# Altium PCB SumoPCB.PcbDoc (part 2 of 2)
Units mil, origin at the board's own origin, x right, y up, seen from the top; angles counter-clockwise.
Board outline 5511.81 x 5511.81 mil, 2 copper layers (Top Layer, Bottom Layer); 161 components, 158 nets, 711 pads, 189 vias.
Unrouted connection lines stored in the file: 147.
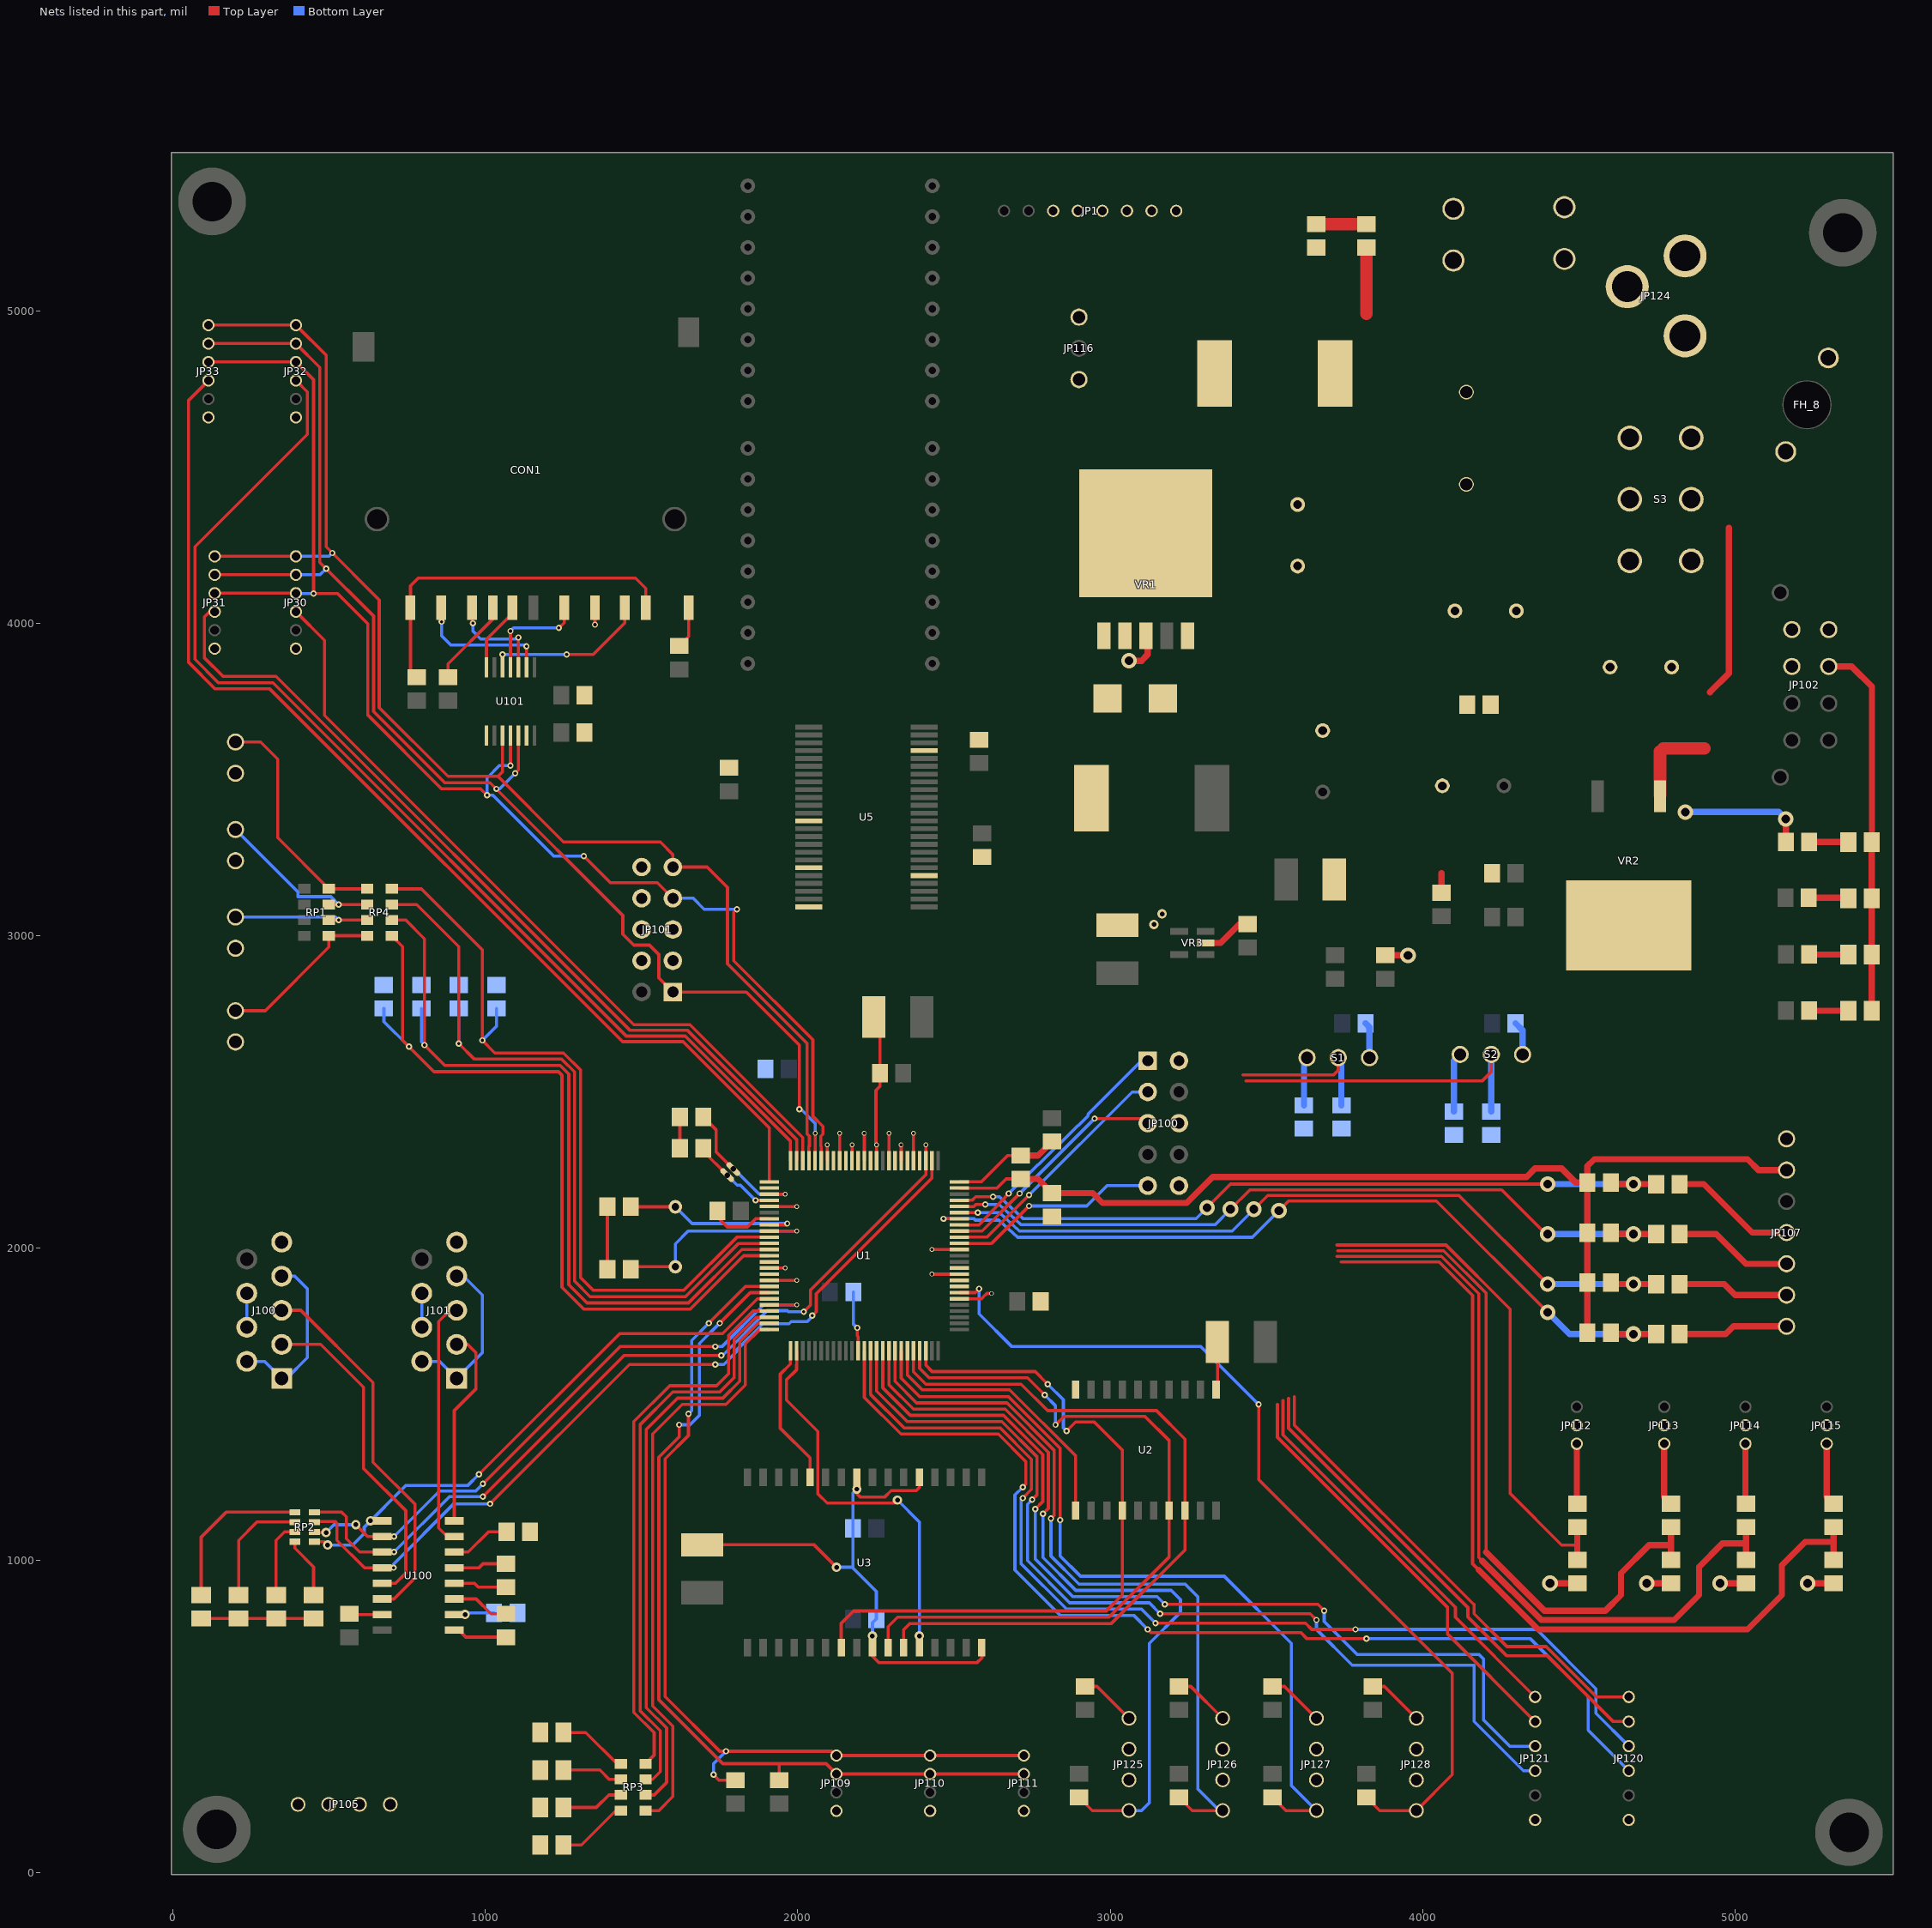
[diagram p2: the nets of this part, all layers, seen from the top]

## Via types
v1: diameter 20, hole 10, Top Layer to Bottom Layer, 98 vias
v2: diameter 30, hole 15, Top Layer to Bottom Layer, 37 vias
v3: diameter 50, hole 28, Top Layer to Bottom Layer, 32 vias
v4: diameter 15, hole 10, Top Layer to Bottom Layer, 21 vias
v5: diameter 35, hole 20, Top Layer to Bottom Layer, 1 vias

## Nets (pads, with @x,y where several pads share a name; then routed paths per layer and width w, separated by ;. In a path a pad name is that pad's centre, name@x,y a point inside that pad or via, vN(x,y) a via of type N, cw(c..) or ccw(c..) an arc to the next point about the centre after c; other vN are vias at no path point) (continued)
AD5: U1.73 U2.14 U3.23 | length 2344
  Top Layer w10: U3.23@2138.92,721.28 2138.92,798.92 2178.92,838.92 2987.35,838.92 3038.92,890.49 3038.92,1353.92 2948.84,1444 2889,1444 v1(2860,1415) ; U1.73@2409.55,1671.91 2409.55,1625.45 2430,1605 2760,1605 v1(2800,1565)
  Bottom Layer w10: v1(2800,1565) 2850,1515 2850,1425 v1(2860,1415)
AD6: U1.72 U2.17 U3.26 | length 2441
  Top Layer w10: U3.26@2288.92,721.28 2288.92,788.92 2318.92,818.92 2995.64,818.92 3188.92,1012.2 3188.92,1383.92 3110.84,1462 2852,1462 v1(2825,1435) ; U1.72@2389.87,1671.91 2389.87,1615.13 2420,1585 2735,1585 v1(2790,1530)
  Bottom Layer w10: v1(2790,1530) 2825,1495 v1(2825,1435)
AD7: U1.71 U2.18 U3.27 | length 2443.5
  Top Layer w10: U3.27@2338.92,721.28 2338.92,778.92 2358.92,798.92 3003.92,798.92 3238.92,1033.92 3238.92,1388.92 3147.84,1480 2800,1480 2715,1565 2410,1565 2370.18,1604.82 U1.71@2370.18,1671.91
ADC0: R120.1 R121.2 U1.97 | length 2383.5
  Top Layer w10: U1.97@2516.83,2153.21 2557.76,2153.21 2569.54,2165 v1(2625,2165) ; v3(3310,2130) 3385,2205 v3(4400,2205)
  Top Layer w20: R121.2@4602.4,2210 4607.4,2205 R120.1@4747.6,2205
  Bottom Layer w10: v1(2625,2165) 2645,2165 2720,2095 3275,2095 v3(3310,2130)
  Bottom Layer w20: v3(4400,2205) v3(4675,2205)
ADC1: R122.1 R123.2 U1.96 | length 2438.9
  Top Layer w10: U1.96@2516.83,2133.53 2563.53,2133.53 2570,2140 v1(2600,2140) ; v3(3385,2125) 3447,2187 4253,2187 4395,2045 v3(4400,2045)
  Top Layer w20: R123.2@4602.4,2050 4607.4,2045 R122.1@4747.6,2045
  Bottom Layer w10: v1(2600,2140) 2644.54,2140 2714.54,2075 3335,2075 v3(3385,2125)
  Bottom Layer w20: v3(4400,2045) v3(4675,2045)
ADC2: R124.1 R125.2 U1.95 | length 2493.3
  Top Layer w10: U1.95@2516.83,2113.84 v1(2576.16,2113.84) ; v3(3460,2125) 3504,2169 4116,2169 v3(4400,1885)
  Top Layer w20: R125.2@4602.4,1890 4607.4,1885 R124.1@4747.6,1885
  Bottom Layer w10: v1(2576.16,2113.84) 2645.25,2113.84 2709.09,2055 3390,2055 v3(3460,2125)
  Bottom Layer w20: v3(4400,1885) v3(4675,1885)
ADC3: R126.1 R127.2 U1.94 | length 2660.9
  Top Layer w10: v1(2465.84,2094.16) U1.94@2516.83,2094.16 ; v3(3540,2120) 3571,2151 4044,2151 v3(4400,1795)
  Top Layer w20: R127.2@4602.4,1730 4607.4,1725 R126.1@4747.6,1725
  Bottom Layer w10: v1@2470,2090 v1(2465.84,2094.16) 2564.26,2094.16 2568.42,2090 2643.63,2090 2703.63,2035 3455,2035 v3(3540,2120)
  Bottom Layer w20: v3(4400,1795) 4470,1725 v3(4675,1725)
AGND: C8.2 JP107.2 R2.2 R121.1 R123.1 R125.1 R127.1 U1.99 | length 3312.4
  Top Layer w10: U1.99@2516.83,2192.58 2637.58,2192.58 2666.52,2221.52 C8.2@2713.92,2221.52
  Top Layer w20: C8.2@2713.92,2221.52 2768.72,2221.52 R2.2@2813.92,2176.32 2943.68,2176.32 2975,2145 3245,2145 3328,2228 4333,2228 4360,2255 4445,2255 4490,2210 R121.1@4527.6,2210 ; R127.1@4527.6,1730 4527.6,2262.6 4550,2285 5040,2285 5075,2250 JP107.2@5165,2250
ALE: U1.70 U2.11 | length 898.9
  Top Layer w10: U1.70@2350.5,1671.91 2350.5,1594.5 2398,1547 2678,1547 2888.92,1336.08 U2.11@2888.92,1160.02
AVCC: C8.1 R1.1 U1.100 | length 350.6
  Top Layer w10: U1.100@2516.83,2212.27 2587.27,2212.27 2671.32,2296.32 C8.1@2713.92,2296.32
  Top Layer w20: C8.1@2713.92,2296.32 2768.72,2296.32 R1.1@2813.92,2341.52
BMP1: C130.2 RP4.8 U1.35 | length 2492
  Top Layer w10: RP4.8@700,3150 795,3150 990,2955 v1(990,2665) 1030,2625 1250,2625 1305,2570 1305,1905 1345,1865 1635,1865 1805.1,2035.1 U1.35@1908.57,2035.1
  Bottom Layer w10: v1(990,2665) 1035,2710 C130.2@1035,2767.6
BMP2: C131.2 RP4.7 U1.36 | length 2485.4
  Top Layer w10: RP4.7@700,3100 780,3100 915,2965 v1(915,2655) 965,2605 1244.54,2605 1285,2564.54 1285,1895 1335,1845 1640.46,1845 1810.87,2015.42 U1.36@1908.57,2015.42
  Bottom Layer w10: v1(915,2655) C131.2@915,2767.6
BMP3: C132.2 RP4.6 U1.37 | length 2502.5
  Top Layer w10: RP4.6@700,3050 745,3050 805,2990 v1(805,2650) 870,2585 1239.09,2585 1267,2557.09 1267,1883 1325,1825 1650,1825 1820.73,1995.73 U1.37@1908.57,1995.73
  Bottom Layer w10: C132.2@795,2767.6 795,2660 v1(805,2650)
BMP4: C133.2 RP4.5 U1.38 | length 2503.4
  Top Layer w10: RP4.5@700,3000 735,2965 735,2665 835,2565 1233.63,2565 1245,2553.63 1245,1875 1315,1805 1655.46,1805 1826.5,1976.05 U1.38@1908.57,1976.05
  Bottom Layer w10: C133.2@675,2767.6 675,2725 v1(755,2645)
DIAG1: RP3.8 U1.47 | length 1785.2
  Top Layer w10: RP3.8@1512.6,350 1540,377.4 1540,449.54 1475,514.54 1475,1445 1590,1560 1740,1560 1778,1598 1778,1720.54 1856.34,1798.88 U1.47@1908.57,1798.88
DIAG2: RP3.7 U1.48 | length 1822.9
  Top Layer w10: RP3.7@1512.6,300 1535,300 1560,325 1560,455 1495,520 1495,1435 1600,1540 1750,1540 1796,1586 1796,1708.46 1866.2,1778.65 1866.2,1779.2 U1.48@1908.57,1779.2
DIAG3: RP3.6 U1.49 | length 1849.5
  Top Layer w10: RP3.6@1512.6,250 1540,250 1580,290 1580,464.54 1515,529.54 1515,1420 1615,1520 1760,1520 1814,1574 1814,1701 1872.51,1759.51 U1.49@1908.57,1759.51
DIAG4: RP3.5 U1.50 | length 1882.3
  Top Layer w10: RP3.5@1512.6,200 1555,200 1600,245 1600,470 1535,535 1535,1405 1630,1500 1770,1500 1832,1562 1832,1693.54 1878.28,1739.83 U1.50@1908.57,1739.83
GND: C1.2 C2.2 C3.2 C4.1 C5.1 C6.1 C7.1 C10.1 C11.1 C12.1 C13.1 C14.1 C15.1 C39.2 C40.2 C41.2 C42.2 C43.2 C44.2 C45.2 C46.2 C47.2 C48.1 C49.1 C60.1 C61.2 C103.2 C104.2 C105.2 C110.1 C111.1 C113.2 C114.2 C115.1 C130.1 C131.1 C132.1 C133.1 CON1.3 CON1.6 D1.1 DS1.2 DS2.2 DS3.2 DS4.2 DS5.2 DS6.2 DS7.2 DS8.2 DS10.2 DS11.2 DS12.2 DS13.2 J100.5 J101.5 JP1.3 JP1.6 JP30.1 JP31.1 JP32.1 JP33.1 JP100.2 JP100.10 JP101.3 JP101.4 JP101.6 JP101.8 JP101.10 JP102.1 JP102.2 JP102.5 JP102.6 JP107.1 JP109.1 JP110.1 JP111.1 JP112.2 JP113.2 JP114.2 JP115.2 JP116.1 JP120.1 JP121.1 JP122.2 JP123.2 JP124.2 JP124.3 JP125.2 JP125.3 JP126.2 JP126.3 JP127.2 JP127.3 JP128.2 JP128.3 JP130.1 JP131.1 JP132.1 JP133.1 R2.1 R67.2 R68.2 R71.1 R73.1 R75.1 R77.1 R202.2 R204.2 R206.2 S3.1 S3.4 U1.11 U1.32 U1.62 U1.81 U2.1 U2.10 U3.5 U3.9 U3.25 U3.32 U5.5 U5.21 U5.37 U5.43 U5.48 U100.15 U101.7 VR1.3 VR1.5 VR2.4 VR3.2 | length 5898.1
  Top Layer w10: DS10.2@90,815 DS13.2@450,815 ; C105.2@567.4,827.4 U100.15@669.84,827.4 ; U101.7@1003.23,3859.25 1003.23,3948.23 1086.77,4031.77 CON1.3@1086.77,4050 ; v1(1350.55,3995.55) CON1.6@1350.55,4050 ; C5.1@1390.38,1932.5 C4.1@1390.38,2132.5 ; C6.1@1622.6,2320 C7.1@1622.6,2420 ; C3.2@1693.92,1050.69 2052.15,1050.69 v2(2123.92,978.92) ; C11.1@1742.6,2120 1742.6,2099.4 1774,2068 1838.99,2068 1855.99,2085 1865.16,2094.16 U1.32@1908.57,2094.16 ; U3.9@2188.92,1266.56 2188.92,1213.92 2198.92,1203.92 2278.92,1203.92 2298.92,1223.92 2378.92,1223.92 2388.92,1233.92 U3.5@2388.92,1266.56 ; v1(2190,1745) 2190,1719.71 2193.02,1716.7 U1.62@2193.02,1671.91 ; v2(2238.92,758.92) 2238.92,693.92 2258.92,673.92 2573.92,673.92 2588.92,688.92 U3.32@2588.92,721.28 ; C1.2@2243.23,2740 2262.6,2720.63 2262.6,2517.6 2250,2505 2250,2332.76 v4(2252.07,2330.69) U1.11@2252.07,2280.18 ; U1.81@2516.83,1838.25 2587.79,1838.25 2599.54,1850 2600,1850 2605,1855 v4(2620,1855) ; U2.1@3338.92,1547.82 3343.23,1552.13 C2.2@3343.23,1700
  Top Layer w20: VR3.2@3305.32,2977 3353,2977 3413.4,3037.4 C43.2@3440,3037.4 ; R206.2@3880,2937.4 v3(3953.4,2937.4) ; R204.2@4060,3137.4 4060,3200 ; v3(4407.6,927.6) R71.1@4495,927.6 ; v3(4717.4,927.6) R73.1@4795,927.6 ; v3(4952.4,927.6) R75.1@5035,927.6 ; v3(5232.6,927.6) R77.1@5315,927.6 ; JP102.2@5300,3861.89 5373.11,3861.89 5438,3797 5438,3300.6 DS1.2@5437.4,3300 DS3.2@5437.4,2940 DS8.2@5437.4,2760
  Top Layer w20.47: v3(3060,3880) 3100,3880 3120,3900 VR1.3@3120,3930
  Bottom Layer w10: v2(2123.92,978.92) 2173.92,978.92 ; C12.1@2177.4,1860 2177.4,1757.6 v1(2190,1745) ; v2(2188.92,1228.92) 2176.52,1216.52 2176.52,981.52 2173.92,978.92 ; v2(2238.92,758.92) 2238.92,801.52 C13.1@2251.32,813.92 2251.32,901.52 2173.92,978.92
  other v2: 3140,3036 3166,3070
IRD1: R70.1 R71.2 U1.86 | length 1618.5
  Top Layer w10: 3725,2010 4075,2010 4280,1805 4280,1215 4445,1050 4495,1050
  Top Layer w20: R71.2@4495,1002.4 R70.1@4495,1107.6
IRD2: R72.1 R73.2 U1.85 | length 2350.9
  Top Layer w10: v4(2429.2,1916.99) U1.85@2516.83,1916.99 ; 3728,1992 4067.54,1992 4203,1856.54 4203,1027
  Top Layer w20: 4203,1027 4390,840 4585,840 4635,890 4635,960 4725,1050 4795,1050 ; R73.2@4795,1002.4 R72.1@4795,1107.6
IRD3: R74.1 R75.2 U1.84 | length 2545
  Top Layer w10: 3726,1974 4060.09,1974 4180,1854.09 4180,1010 4191,999
  Top Layer w20: 4191,999 4380,810 4805,810 4885,890 4885,980 4960,1055 5035,1055 ; R75.2@5035,1002.4 R74.1@5035,1107.6
IRD4: R76.1 R77.2 U1.83 | length 2842.9
  Top Layer w10: 3739,1956 4052.63,1956 4160,1848.63 4160,990 4179,971
  Top Layer w20: 4179,971 4370,780 5040,780 5150,890 5150,985 5225,1060 5315,1060 ; R77.2@5315,1002.4 R76.1@5315,1107.6
LINE1: JP125.1 R100.2 U1.67 | length 2492.8
  Top Layer w10: U1.67@2291.44,1671.91 2291.44,1563.56 2370,1485 2663.63,1485 2802,1346.63 2802,1167 v1(2785,1150) ; R100.2@2900,242.6 2942.6,200 JP125.1@3060,200
  Bottom Layer w10: v1(2785,1150) 2785,1010 2890,905 3195,905 3225,875 3225,835 3125,735 3125,225 3100,200 JP125.1@3060,200
LINE2: JP126.1 R102.2 U1.68 | length 2446.7
  Top Layer w10: U1.68@2311.13,1671.91 2311.13,1573.87 2380,1505 2669.09,1505 2820,1354.09 2820,1145 v1(2810,1135) ; R102.2@3220,242.6 3262.6,200 JP126.1@3360,200
  Bottom Layer w10: v1(2810,1135) 2810,1015 2900,925 3240,925 3280,885 3280,270 3350,200 JP126.1@3360,200
LINE3: JP127.1 R104.2 U1.69 | length 2616.3
  Top Layer w10: U1.69@2330.81,1671.91 2330.81,1584.19 2390,1525 2674.54,1525 2840,1359.54 v1(2840,1130) ; R104.2@3520,242.6 3562.6,200 JP127.1@3660,200
  Bottom Layer w10: v1(2840,1130) 2840,1015 2905,950 3365,950 3580,735 3580,280 JP127.1@3660,200
LINE4: JP128.1 R106.2 U1.82 | length 2945.4
  Top Layer w10: U1.82@2516.83,1857.94 2567.94,1857.94 v1(2580,1870) ; v1(3475,1500) 3475,1260 4095,640 4095,315 JP128.1@3980,200 3862.6,200 R106.2@3820,242.6
  Bottom Layer w10: v1(2580,1870) 2580,1790 2685,1685 3290,1685 v1(3475,1500)
MOT1_PWM_A: JP1.5 U1.16
MOT1_PWM_B: JP1.4 U1.17 | length 87.6
  Top Layer w10: U1.17@2133.96,2280.18 v4(2133.96,2367.82)
MOT2_PWM_A: JP1.8 U1.6
MOT2_PWM_B: JP1.7 U1.7 | length 50.5
  Top Layer w10: U1.7@2330.81,2280.18 v4(2330.81,2330.69)
MOUSE1_X1: JP120.3 U1.63 | length 3407.5
  Top Layer w10: U1.63@2212.7,1671.91 2212.7,1522.3 2330,1405 2641.81,1405 2730,1316.81 2730,1245 v1(2720,1235) ; v1(3120,780) 3130,770 3610,770 3630,750 v1(3820,750)
  Bottom Layer w10: v1(2720,1235) 2695,1210 2695,970 2840,825 3075,825 v1(3120,780) ; v1(3820,750) 4345,750 4530,565 4530,457.48 JP120.3@4660,327.48
MOUSE1_X2: JP120.5 U1.12 | length 1590.5
  Top Layer w10: 3571,1519 3571,1424 4145,850 4145,820 4270,695 4400,695 4610.04,484.96 JP120.5@4660,484.96
MOUSE1_Y1: JP120.4 U1.64 | length 3322.1
  Top Layer w10: U1.64@2232.39,1671.91 2232.39,1532.61 2340,1425 2647.27,1425 2748,1324.27 2748,1228 v1(2720,1200) ; v1(3145,800) 3625,800 3645,780 v1(3785,780)
  Bottom Layer w10: v1(2720,1200) 2715,1195 2715,990 2860,845 3100,845 v1(3145,800) ; v1(3785,780) 4365,780 4555,590 4555,511.22 JP120.4@4660,406.22
MOUSE1_Y2: JP120.6 U1.13 | length 1626.7
  Top Layer w10: U1.13@2212.7,2280.18 v4(2212.7,2367.82) ; 3589,1524 3589,1434 4163,860 4165,860 4165,830 4270,725 4395.46,725 4556.76,563.7 JP120.6@4660,563.7
MOUSE2_X1: JP121.3 U1.65 | length 3101.5
  Top Layer w10: U1.65@2252.07,1671.91 2252.07,1542.93 2350,1445 2652.72,1445 2766,1331.72 2766,1211 v1(2750,1195) ; v1(3160,830) 3640,830 v1(3660,810)
  Bottom Layer w10: v1(2750,1195) 2735,1180 2735,1000 2870,865 3125,865 v1(3160,830) ; v1(3660,810) 3660,780 3775,665 4165,665 4165,485 4322.52,327.48 JP121.3@4360,327.48
MOUSE2_X2: JP121.5 U1.14 | length 1356.8
  Top Layer w10: 3535,1500 3535,1395 4080,850 4080,764.96 JP121.5@4360,484.96
MOUSE2_Y1: JP121.4 U1.66 | length 3046.5
  Top Layer w10: U1.66@2271.76,1671.91 2271.76,1553.24 2360,1465 2658.18,1465 2784,1339.18 2784,1189 v1(2760,1165) ; v1(3175,860) 3665,860 v1(3685,840)
  Bottom Layer w10: v1(2760,1165) 2760,1005 2880,885 3150,885 v1(3175,860) ; v1(3685,840) 3685,805 3790,700 4180,700 4195,685 4195,490 4278.78,406.22 JP121.4@4360,406.22
MOUSE2_Y2: JP121.6 U1.15 | length 1333.1
  Top Layer w10: U1.15@2173.33,2280.18 v4(2173.33,2330.69) ; 3553,1512 3553,1402.46 4105,850.46 4105,818.7 JP121.6@4360,563.7
NetC40_1: C40.1 L1.2 VR1.2
NetC100_1: C100.1 U100.3 | length 184.6
  Top Layer w10: U100.3@900.16,877.4 970,877.4 1017.6,829.8 C100.1@1065,829.8
NetC100_2: C100.2 U100.1 | length 174.1
  Top Layer w10: U100.1@900.16,777.4 915,777.4 937.4,755 C100.2@1065,755
NetC101_1: C101.1 U100.5 | length 170
  Top Layer w10: U100.5@900.16,977.4 980,977.4 992.4,989.8 C101.1@1065,989.8
NetC101_2: C101.2 U100.4 | length 170
  Top Layer w10: U100.4@900.16,927.4 965,927.4 977.4,915 C101.2@1065,915
NetC103_1: C103.1 U100.2 | length 129.5
  Top Layer w10: U100.2@900.16,827.4 v2(935,827.4)
  Bottom Layer w10: v2(935,827.4) 940,832.4 C103.1@1027.6,832.4
NetC104_1: C104.1 U100.6 | length 194.4
  Top Layer w10: U100.6@900.16,1027.4 945,1027.4 1010,1092.4 C104.1@1067.6,1092.4
NetCON1_1: CON1.1 U101.2 | length 442.8
  Top Layer w10: CON1.1@858.43,4050 858.43,4006.57 v1(860,4005) ; U101.2@1131.18,3859.25 v1(1131.18,3926.18)
  Bottom Layer w10: v1(860,4005) 860,3960 890,3930 1127.36,3930 v1(1131.18,3926.18)
NetCON1_2: CON1.2 U101.3 | length 329.2
  Top Layer w10: CON1.2@956.85,4050 956.85,4003.15 v1(960,4000) ; U101.3@1105.59,3859.25 v1(1105.59,3954.41)
  Bottom Layer w10: v1(960,4000) 960,3975 985,3950 1101.18,3950 v1(1105.59,3954.41)
NetCON1_5: CON1.5 U101.4 | length 347
  Top Layer w10: U101.4@1080,3859.25 v1(1080,3975) ; v1(1235,3985) 1252.13,4002.13 CON1.5@1252.13,4050
  Bottom Layer w10: v1(1080,3975) 1090,3985 v1(1235,3985)
NetCON1_7: CON1.7 U101.5 | length 522.9
  Top Layer w10: U101.5@1054.41,3859.25 1054.41,3899.41 v1(1055,3900) ; v1(1260,3900) 1345,3900 1446.22,4001.22 CON1.7@1446.22,4050
  Bottom Layer w10: v1(1055,3900) v1(1260,3900)
NetCON1_8: CON1.8 CON1.9 R118.1 | length 1140
  Top Layer w10: R118.1@780,3827.4 760,3847.4 760,4120 785,4145 1480,4145 1513.15,4111.85 CON1.8@1513.15,4050
NetD1_2: D1.2 L2.1 VR1.1
NetDS1_1: DS1.1 R3.1 | length 125.2
  Top Layer w20: R3.1@5237.4,3300 DS1.1@5362.6,3300
NetDS2_1: DS2.1 R4.1 | length 124.6
  Top Layer w20: R4.1@5236,3122 DS2.1@5360.6,3122
NetDS3_1: DS3.1 R5.1 | length 125.2
  Top Layer w20: R5.1@5237.4,2940 DS3.1@5362.6,2940
NetDS4_1: DS4.1 RP3.1 | length 225.3
  Top Layer w10: DS4.1@1250,450 1321,450 1421,350 RP3.1@1433.86,350
NetDS5_1: DS5.1 RP3.2 | length 196.3
  Top Layer w10: DS5.1@1250,330 1366,330 1396,300 RP3.2@1433.86,300
NetDS6_1: DS6.1 RP3.3 | length 200.4
  Top Layer w10: DS6.1@1250,210 1355,210 1395,250 RP3.3@1433.86,250
NetDS7_1: DS7.1 RP3.4 | length 229.4
  Top Layer w10: DS7.1@1250,90 1307,90 1417,200 RP3.4@1433.86,200
NetDS8_1: DS8.1 R10.1 | length 125.2
  Top Layer w20: R10.1@5237.4,2760 DS8.1@5362.6,2760
NetDS10_1: DS10.1 RP2.1 | length 518.3
  Top Layer w10: DS10.1@90,889.8 90,1075 170,1155 RP2.1@390,1155
NetDS11_1: DS11.1 RP2.2 | length 379.4
  Top Layer w10: DS11.1@210,889.8 210,1065 268.5,1123.5 RP2.2@390,1123.5
NetDS12_1: DS12.1 RP2.3 | length 246.4
  Top Layer w10: DS12.1@330,889.8 330,1065 357.01,1092.01 RP2.3@390,1092.01
NetDS13_1: DS13.1 RP2.4 | length 195.6
  Top Layer w10: RP2.4@390,1060.51 390,1040 450,980 DS13.1@450,889.8
NetFH_8_2: FH_8.2 S3.3 S3.6
NetJ100_1: J100.1 J100.4 J100.6 | length 563
  Bottom Layer w10: J100.6@236.06,1637.72 293.35,1637.72 J100.1@347.87,1583.19 363.19,1583.19 430,1650 430,1870 389.65,1910.35 J100.4@347.87,1910.35
NetJ100_2: J100.2 U100.13 | length 1058.6
  Top Layer w10: J100.2@347.87,1692.24 472.76,1692.24 610,1555 610,1295 745,1160 745,960 712.4,927.4 U100.13@669.84,927.4
NetJ100_3: J100.3 U100.14 | length 1202
  Top Layer w10: J100.3@347.87,1801.3 408.7,1801.3 640,1570 640,1315 775,1180 775,945 707.4,877.4 U100.14@669.84,877.4
NetJ100_7: J100.7 J100.8 | length 109.1
  Bottom Layer w10: J100.7@236.06,1746.77 J100.8@236.06,1855.83
NetJ101_1: J101.1 J101.4 J101.6 | length 542.4
  Bottom Layer w10: J101.6@796.06,1637.72 853.35,1637.72 J101.1@907.87,1583.19 990,1665.31 990,1850 929.65,1910.35 J101.4@907.87,1910.35
NetJ101_2: J101.2 U100.8 | length 639.9
  Top Layer w10: U100.8@900.16,1127.4 900.16,1480.16 970,1550 970,1665 942.76,1692.24 J101.2@907.87,1692.24
NetJ101_3: J101.3 U100.7 | length 794.5
  Top Layer w10: U100.7@900.16,1077.4 877.6,1077.4 850,1105 850,1765 886.3,1801.3 J101.3@907.87,1801.3
NetJ101_7: J101.7 J101.8 | length 109.1
  Bottom Layer w10: J101.7@796.06,1746.77 J101.8@796.06,1855.83
NetJP107_4: JP107.4 R120.2 | length 406.8
  Top Layer w20: R120.2@4822.4,2205 4900,2205 5055,2050 JP107.4@5165,2050
NetJP107_5: JP107.5 R122.2 | length 381.9
  Top Layer w20: R122.2@4822.4,2045 4940,2045 5035,1950 JP107.5@5165,1950
NetJP107_6: JP107.6 R124.2 | length 357.1
  Top Layer w20: R124.2@4822.4,1885 4965,1885 5000,1850 JP107.6@5165,1850
NetJP107_7: JP107.7 R126.2 | length 353
  Top Layer w20: R126.2@4822.4,1725 4970,1725 4995,1750 JP107.7@5165,1750
NetJP112_1: JP112.1 R70.2 | length 192.3
  Top Layer w20: JP112.1@4493.39,1374.06 4493.39,1184.02 R70.2@4495,1182.4
NetJP113_1: JP113.1 R72.2 | length 200.6
  Top Layer w20: JP113.1@4773.39,1374.06 4773.39,1204.02 R72.2@4795,1182.4
NetJP114_1: JP114.1 R74.2 | length 192.3
  Top Layer w20: JP114.1@5033.39,1374.06 5033.39,1184.02 R74.2@5035,1182.4
NetJP115_1: JP115.1 R76.2 | length 200.6
  Top Layer w20: JP115.1@5293.39,1374.06 5293.39,1204.02 R76.2@5315,1182.4
NetJP125_4: JP125.4 R101.2 | length 182.3
  Top Layer w10: R101.2@2920,597.4 2957.87,597.4 JP125.4@3060,495.28
NetJP126_4: JP126.4 R103.2 | length 182.3
  Top Layer w10: R103.2@3220,597.4 3257.87,597.4 JP126.4@3360,495.28
NetJP127_4: JP127.4 R105.2 | length 182.3
  Top Layer w10: R105.2@3520,597.4 3557.87,597.4 JP127.4@3660,495.28
NetJP128_4: JP128.4 R107.2 | length 182.3
  Top Layer w10: R107.2@3840,597.4 3877.87,597.4 JP128.4@3980,495.28
NetJP130_2: JP130.2 RP1.4 RP4.1 | length 763.1
  Top Layer w10: JP130.2@200,3620 280,3620 335,3565 335,3313.74 RP1.4@498.74,3150 RP4.1@621.26,3150
NetJP131_2: JP131.2 RP1.3 RP4.2 | length 560.7
  Top Layer w10: RP1.3@498.74,3100 RP4.2@621.26,3100
  Bottom Layer w10: JP131.2@200,3340 400,3140 400,3125 505,3125 v1(530,3100)
NetJP132_2: JP132.2 RP1.2 RP4.3 | length 456.7
  Top Layer w10: RP1.2@498.74,3050 RP4.3@621.26,3050
  Bottom Layer w10: JP132.2@200,3060 520,3060 v1(530,3050)
NetJP133_2: JP133.2 RP1.1 RP4.4 | length 541.9
  Top Layer w10: JP133.2@200,2760 295,2760 498.74,2963.74 RP1.1@498.74,3000 RP4.4@621.26,3000
NetR65_1: R65.1 S1.3 | length 115.2
  Bottom Layer w20: R65.1@3817.4,2720 3830,2707.4 S1.3@3830,2610
NetR66_1: R66.1 S2.3 | length 109.4
  Bottom Layer w20: R66.1@4297.4,2720 4320,2697.4 S2.3@4320,2620
NetR67_1: R67.1 S1.1 | length 156.7
  Bottom Layer w20: R67.1@3620,2457.4 3620,2600 S1.1@3630,2610
NetR68_1: R68.1 S2.1 | length 190.9
  Bottom Layer w20: R68.1@4100,2437.4 4100,2600 S2.1@4120,2620
PL4: JP105.1 U1.39
PL5: JP105.2 U1.40 | length 50.5
  Top Layer w10: U1.40@1908.57,1936.68 v4(1959.08,1936.68)
PL6: JP105.3 U1.41
PL7: JP105.4 U1.42 | length 87.6
  Top Layer w10: U1.42@1908.57,1897.31 v4(1996.2,1897.31)
RD*: U1.52 U3.28 | length 1286
  Top Layer w10: U1.52@1996.16,1671.91 1996.16,1626.16 1995.85,1625.85 1995.85,1610.85 1963.92,1578.92 1963.92,1513.92 2063.92,1413.92 2063.92,1213.92 2093.92,1183.92 2308.92,1183.92 v2(2318.92,1193.92) ; U3.28@2388.92,721.28 v2(2388.92,758.92)
  Bottom Layer w10: v2(2318.92,1193.92) 2388.92,1123.92 v2(2388.92,758.92)
RESET: JP100.6 JP101.5 R11.2 U1.30 | length 87.6
  Top Layer w10: U1.30@1908.57,2133.53 v4(1996.2,2133.53)
RXD1: RP2.7 U1.2 U100.12 | length 2682.1
  Top Layer w10: RP2.7@454.49,1125 520,1125 525,1120 525,1065 612.6,977.4 v1(705.6,977.4) ; v1(1015,1182) 1461,1628 v1(1736,1628) ; v1(2046,1784) 2059,1797 2059,1854 2429.24,2224.24 U1.2@2429.24,2280.18
  Bottom Layer w10: v1(705.6,977.4) 705.6,988.6 899,1182 v1(1015,1182) ; v1(1736,1628) 1763,1628 1804,1669 1804,1674 1888,1758 1972,1758 1979,1765 2030,1765 v1@2046,1781
RXD2: RP2.5 U1.45 U100.9 | length 1835.6
  Top Layer w10: RP2.5@452.99,1060.51 484.49,1060.51 v2(495,1050) ; v2(632.4,1127.4) U100.9@669.84,1127.4 ; v1(979,1276) 1430,1727 1759,1727 1870.25,1838.25 U1.45@1908.57,1838.25
  Bottom Layer w10: v2(495,1050) 575,1050 611.76,1086.76 611.76,1106.76 746,1241 944,1241 v1(979,1276)
SCL: JP109.4 JP110.4 JP111.4 R111.1 U1.43 | length 2890.7
  Top Layer w10: v1(1650,1470) 1650,1400.46 1575,1325.46 1575,565 1750,390 2109.61,390 JP109.4@2123.39,376.22 JP111.4@2723.39,376.22 ; v1(1715,1760) 1832.62,1877.62 U1.43@1908.57,1877.62 ; v1(1730,315) 1747.6,297.4 R111.1@1800,297.4
  Bottom Layer w10: v1(1650,1470) 1660,1480 1660,1705 v1(1715,1760) ; v1(1730,315) 1730,350 v1(1770,390)
SD_CARD_DETECT: CON1.10 R108.1 U1.4 | length 282.2
  Top Layer w10: R108.1@880,3827.4 880,3870 1023.78,4013.78 CON1.10@1023.78,4050
SD_CARD_WP: CON1.11 R109.1 U1.9 | length 222.9
  Top Layer w10: R109.1@1620,3927.4 1650.55,3957.95 CON1.11@1650.55,4050 ; U1.9@2291.44,2280.18 v4(2291.44,2367.82)
SD_TRI_STATE: U1.8 U101.8
SDA: JP109.3 JP110.3 JP111.3 R110.1 U1.44 | length 2824.9
  Top Layer w10: v1(1620,1435) 1620,1395.91 1555,1330.91 1555,555 1760,350 2090.55,350 JP109.3@2123.39,317.17 JP111.3@2723.39,317.17 ; v1(1750,1760) 1847.94,1857.94 U1.44@1908.57,1857.94 ; R110.1@1940,297.4 1940,350
  Bottom Layer w10: v1(1620,1435) 1655,1435 1685,1465 1685,1695 v1(1750,1760)
SOUND_OUT_PWM: JP116.3 U1.5 | length 87.6
  Top Layer w10: U1.5@2370.18,2280.18 v4(2370.18,2367.82)
SPI_MISO: JP30.6 JP31.6 JP32.6 JP33.6 JP101.9 U1.22 U101.10 | length 4493.3
  Top Layer w10: JP33.6@113.39,4954.33 JP32.6@393.39,4954.33 490,4857.72 490,4245 660,4075 660,3730 880,3510 1040,3510 ; JP31.6@133.39,4214.33 JP30.6@393.39,4214.33 ; U101.10@1054.41,3640.75 1054.41,3524.41 1040,3510 ; U1.22@2035.53,2280.18 2035.53,2324.97 2037.22,2326.65 2037.22,2358 2030,2365.22 2030,2655 1775,2910 1775,3155 1710,3220 JP101.9@1600,3220 1600,3260 1560,3300 1250,3300 1040,3510
  Bottom Layer w10: JP30.6@393.39,4214.33 499.33,4214.33 v1(510,4225)
SPI_MOSI: JP30.5 JP31.5 JP32.5 JP33.5 JP101.1 U1.21 U101.12 | length 4408.9
  Top Layer w10: JP33.5@113.39,4895.28 JP32.5@393.39,4895.28 470,4818.66 470,4195 642,4023 642,3718 870,3490 1015,3490 1440,3065 1440,3005 1475,2970 1525,2970 1555,2940 1555,2865 JP101.1@1600,2820 1835,2820 2005,2650 v1(2005,2445) ; JP31.5@133.39,4155.28 JP30.5@393.39,4155.28 ; v1(1095,3520) 1105.59,3530.59 U101.12@1105.59,3640.75 ; U1.21@2055.22,2280.18 v4(2055.22,2367.82)
  Bottom Layer w10: JP30.5@393.39,4155.28 470.28,4155.28 v1(490,4175) ; v1(1035,3470) 1045,3470 v1(1095,3520) ; v1(2005,2445) 2010,2445 2055.22,2399.78 v4(2055.22,2367.82)
SPI_SCK: JP30.4 JP31.4 JP32.4 JP33.4 JP101.7 U1.20 U101.11 | length 4479
  Top Layer w10: JP33.4@113.39,4836.22 JP32.4@393.39,4836.22 450,4779.61 v1(450,4095) 527,4095 624,3998 624,3706 860,3470 985,3470 v1(1005,3450) ; JP31.4@133.39,4096.22 JP30.4@393.39,4096.22 ; v1(1080,3545) U101.11@1080,3640.75 ; v1(1315,3255) 1400,3170 1550,3170 JP101.7@1600,3120 ; v1(1805,3085) 1795,3075 1795,2920 2048,2667 2048,2422 2080,2390 2080,2364.79 2073.22,2358 2073.22,2326.66 2074.9,2324.97 U1.20@2074.9,2280.18
  Bottom Layer w10: JP30.4@393.39,4096.22 394.61,4095 v1(450,4095) ; v1(1080,3545) 1045,3545 1005,3505 v1(1005,3450) 1023.64,3450 1218.64,3255 v1(1315,3255) ; JP101.7@1600,3120 1665,3120 1700,3085 v1(1805,3085)
SPI_SS2*: JP30.3 U1.23 | length 2534.3
  Top Layer w10: JP30.3@393.39,4037.17 485,3945.55 485,3705 1475,2715 1654.77,2715 2015.85,2353.92 U1.23@2015.85,2280.18
SPI_SS3*: JP31.3 U1.24 | length 2773.3
  Top Layer w10: JP31.3@133.39,4037.17 117.17,4037.17 100,4020 100,3890 160,3830 330,3830 1463,2697 1647.31,2697 1996.16,2348.15 U1.24@1996.16,2280.18
SPI_SS4*: JP32.3 U1.25 | length 3664.1
  Top Layer w10: JP32.3@393.39,4777.17 430,4740.55 430,4605 70,4245 70,3885 145,3810 320,3810 1451,2679 1639.86,2679 1976.48,2342.38 U1.25@1976.48,2280.18
SPI_SS5*: JP33.3 U1.26 | length 3576.8
  Top Layer w10: JP33.3@113.39,4777.17 50,4713.78 50,3875 135,3790 310,3790 1439,2661 1632.4,2661 1908.57,2384.84 U1.26@1908.57,2212.27
SPI_SS*: U1.19 U101.13 | length 50.5
  Top Layer w10: U1.19@2094.59,2280.18 v4(2094.59,2330.69)
SW1: C60.2 S1.2 U1.18 | length 508
  Top Layer w10: 3425,2555 3715,2555 3730,2570 S1.2@3730,2610
  Bottom Layer w20: S1.2@3730,2610 3740,2600 C60.2@3740,2457.4
SW2: C61.1 S2.2 U1.27 | length 1035
  Top Layer w10: 3435,2535 4190,2535 4220,2565 S2.2@4220,2620
  Bottom Layer w20: C61.1@4220,2437.4 S2.2@4220,2620
TCK: JP100.1 U1.93 | length 803.8
  Top Layer w10: U1.93@2516.83,2074.47 2579.47,2074.47 v1(2675,2175)
  Bottom Layer w10: v1(2675,2175) 2928.72,2423.72 2928.72,2428.72 JP100.1@3100,2600
TDI: JP100.9 U1.90 | length 679.6
  Top Layer w10: U1.90@2516.83,2015.42 2620.42,2015.42 v1(2740,2135)
  Bottom Layer w10: v1(2740,2135) 2925,2135 2990,2200 JP100.9@3120,2200
TDO: JP100.3 U1.91 | length 795.7
  Top Layer w10: U1.91@2516.83,2035.1 2605.1,2035.1 v1(2740,2170)
  Bottom Layer w10: v1(2740,2170) 3070,2500 JP100.3@3120,2500
TMS: JP100.5 U1.92 | length 758.6
  Top Layer w10: U1.92@2516.83,2054.79 2589.79,2054.79 v1(2710,2175) ; v1(2950,2415) 3105,2415 JP100.5@3120,2400
  Bottom Layer w10: v1(2710,2175) v1(2950,2415)
TOSC1: C6.2 U1.29 Y2.1 | length 285.9
  Top Layer w10: C6.2@1697.4,2320 1697.4,2310.44 Y2.1@1773.92,2233.92 ; v1(1864.79,2153.21) U1.29@1908.57,2153.21
  Bottom Layer w10: Y2.1@1773.92,2233.92 1805.84,2202 1816,2202 v1(1864.79,2153.21)
TOSC2: C7.2 U1.28 Y2.2 | length 453.1
  Top Layer w10: C7.2@1697.4,2420 1738,2379.4 1738,2308.81 Y2.2@1793.41,2253.41 ; U1.28@1908.57,2172.9 v4(1959.08,2172.9)
  Bottom Layer w10: Y2.2@1796.17,2253.41 1876.69,2172.9 v4(1959.08,2172.9)
TXD1: RP2.8 U1.3 U100.11 | length 2676.6
  Top Layer w10: RP2.8@452.99,1155 540,1155 555,1140 555,1070 597.6,1027.4 v1(707.4,1027.4) ; v1(992,1205) 1444,1657 v1(1755,1657) ; v1(2019,1797) 2041,1819 2041,1867 2409.55,2235.55 v4(2409.55,2330.69)
  Bottom Layer w10: v1(707.4,1027.4) 885,1205 v1(992,1205) ; v1(1755,1657) 1759,1657 1902,1800 1966.24,1800 1969.24,1797 v1(2019,1797)
TXD2: RP2.6 U1.46 U100.10 | length 1961.8
  Top Layer w10: RP2.6@455,1090 v2(490,1090) ; v2(585,1115) 622.6,1077.4 v1(707.4,1077.4) ; v1(992,1246) 1431,1685 v1(1736,1685) ; U1.46@1908.57,1818.57 v4(1996.2,1818.57)
  Bottom Layer w10: v2(490,1090) 515,1115 v2(585,1115) ; v1(707.4,1077.4) 853,1223 969,1223 v1(992,1246) ; v1(1736,1685) 1757,1685 1890.57,1818.57 v4(1996.2,1818.57)
VBAT: C39.1 C42.1 C44.1 C45.1 JP122.1 L1.1 R3.2 R201.1 S3.2 S3.5 VR2.1 | length 1454.1
  Top Layer w20: R3.2@5162.6,3300 v3(5162.6,3373.6)
  Top Layer w20.47: 4760,3590 4770,3600 ; 4920,3780 4980,3840 4980,4305.47
  Top Layer w40: 3820,4990 R201.1@3820,5202.6 ; VR2.1@4760,3450 4760,3590 ; 4770,3600 4902.6,3600
  Bottom Layer w20: v3(4841,3396) 5140.2,3396 v3(5162.6,3373.6)
VBATIN: FH_8.1 JP123.1 JP124.1
VBATSENSE: R201.2 R202.1 U1.89 | length 250.2
  Top Layer w10: v4(2429.2,1995.73) U1.89@2516.83,1995.73
  Top Layer w40: R202.1@3657.4,5277.4 R201.2@3820,5277.4
WR*: U1.51 U3.12 | length 458.2
  Top Layer w10: U1.51@1976.48,1671.91 1976.48,1631.48 1976.16,1631.16 1976.16,1629.38 1943.92,1597.14 1943.92,1423.92 2038.92,1328.92 U3.12@2038.92,1266.56
XTAL1: C5.2 U1.34 Y1.2 | length 712.3
  Top Layer w10: C5.2@1465.18,1932.5 1473.05,1940.38 Y1.2@1607.78,1940.38 ; U1.34@1908.57,2054.79 v4(1996.2,2054.79)
  Bottom Layer w10: Y1.2@1607.78,1940.38 1607.78,2013.78 1648.79,2054.79 v4(1996.2,2054.79)
XTAL2: C4.2 U1.33 Y1.1 | length 582.3
  Top Layer w10: C4.2@1465.18,2132.5 Y1.1@1607.78,2132.5 ; U1.33@1908.57,2074.47 1961.47,2074.47 v1(1966,2079)
  Bottom Layer w10: Y1.1@1607.78,2132.5 1661.28,2079 v1(1966,2079)
pads on no net: CON1. CON1.12 FH_8. H1.1 H2.1 H3.1 H4.1 J100.9 J101.9 JP100.8 JP102.nc LED1.1 LED1.2 LED1.3 LED1.4 LED1.5 LED1.6 LED1.7 LED1.8 LED1.9 LED1.10 LED1.11 LED1.12 LED1.13 LED1.14 LED1.15 LED1.16 LED2.1 LED2.2 LED2.3 LED2.4 LED2.5 LED2.6 LED2.7 LED2.8 LED2.9 LED2.10 LED2.11 LED2.12 LED2.13 LED2.14 LED2.15 LED2.16 U1.1 U1.98 U5.1 U5.2 U5.3 U5.4 U5.6 U5.7 U5.9 U5.10 U5.11 U5.12 U5.13 U5.14 U5.15 U5.16 U5.17 U5.20 U5.22 U5.23 U5.24 U5.25 U5.26 U5.27 U5.28 U5.29 U5.30 U5.32 U5.33 U5.35 U5.36 U5.38 U5.39 U5.40 U5.41 U5.42 U5.44 U5.45 U5.46 U5.47 U101.6 U101.9 VR3.4

## Polygon pours and split planes (outlines as drawn)
VBAT on Top Layer (hatched 90Degree grid 20 track 20.47): 4980,4300 4500,4300 4310,4490 3700,4490 3700,4650 3570,4650 3500,4720 3500,5090 3960,5090 3960,5030 4070,5030 4340,4770 4520,4770 4520,4500 4980,4500
NetC40_1 on Top Layer (hatched 90Degree grid 20 track 20.47): 3280,4500 3344.69,4500 3344.69,4120 3440,4120 3540,4220 3670,4351.82 3670,4645.82 3547.81,4645.82 3497.5,4708.18 3497.5,5020 3280,5020
NetD1_2 on Top Layer (hatched 90Degree grid 20 track 20.47): 2982.63,4000 2850,4000 2850,3130 3030,3130 3030,3840 2992.11,3880 2992.11,4000
5V on Top Layer (hatched 90Degree grid 20 track 20.47): 3060,3670 3060,3130 3500,3130 3500,2920 3650,2920 3650,3360 3780,3360 3780,3510 3390,3510 3390,3630 3150,3630 3110,3670
GND on Top Layer (hatched 90Degree grid 20 track 20.47): 3320,4480 3250,4480 3250,4590 2570,4590 2570,4030 3010,4030 3010,4087.65 3320,4087.65 3320,4400
NetFH_8_2 on Top Layer (hatched 90Degree grid 20 track 20): 4550,4530 5004.6,4530 5004.6,4360 5480,4360 5480,4770 4550,4770
VBATIN on Top Layer (hatched 90Degree grid 20 track 20): 5480,4800 4360,4800 4300,4860 4300,5200 4560,5200 4560,4980 4800,4980 4960,5140 4960,5480 5480,5480
12V on Top Layer (hatched 90Degree grid 20 track 20): 4640,3540 4640,3270 4340,3271 4340,3160 4280,3160 4280,3420 4210,3490 4210,3540
GND on Top Layer (hatched 90Degree grid 20 track 20): 4170,4090 4100,4090 4000,3890 3910,3700 3890,3660 3850,3570 3810,3490 3810,3330 3680,3330 3680,3120 4240,3120 4240,3400 4160,3480 4170,3470
VBAT on Top Layer (hatched 90Degree grid 20 track 20.47): 4200,4090 4710,4090 4710,3790 4920,3790 4920,3370 4680,3370 4680,3570 4200,3570
NetC40_1 on Top Layer (hatched 90Degree grid 20 track 20.47): 3064.29,4040 3430,4040 3430,4280 3030,4280 3030,4075.77 3058.34,4040
NetC40_1 on Top Layer (hatched 90Degree grid 20 track 20.47): 3038.69,4064.8 3038.69,3930 3060,3930 3060,4060 3050,4060
GND on Top Layer (hatched 90Degree grid 20 track 20.47): 3230,3990 3230,3810 3230,3790 3130,3790 3130,3700 3170,3660 3410,3660 3410,3600 3610,3600 3820,3600 4080,4120 4905,4120 4903,4270 4490,4270 4300,4460 3700,4460 3700,4340 3680,4320 3470,4110 3470,4000 3230,4000
VBAT on Top Layer (hatched 90Degree grid 10 track 10, remove dead copper): 4026,5226 4187,5226 4187,4900 3940,4900 3940,5115
GND on Top Layer (hatched 90Degree grid 10 track 10, remove dead copper): 4744,3832 4744,4120 4862,4120 4862,3830 4744,3830
VBAT on Top Layer (hatched 90Degree grid 10 track 10, remove dead copper): 4889,3799 4889,4082 4935,4082 4935,4336 5047,4336 5047,3802 4909,3664
GND on Top Layer (hatched 90Degree grid 10 track 10, remove dead copper): 2960,3005 2960,3105 3473,3105 3473,3019 3362,3019 3362,3044 3169,3044 3130,3005

## Keep-outs
Keep-Out Layer:
  lines w10: -320.16,-5.2 -83.94,-5.2 ; -320.16,5506.61 -83.94,5506.61 ; -222.05,54.8 -202.05,-5.2 ; -222.05,5446.61 -202.05,5506.61 ; -202.05,2374.83 -202.05,-5.2 ; -202.05,3126.59 -202.05,5506.61 ; -182.05,54.8 -202.05,-5.2 ; -182.05,5446.61 -202.05,5506.61 ; -5.2,5585.35 -5.2,5821.57 ; 54.8,5683.46 -5.2,5703.46 ; 54.8,5723.46 -5.2,5703.46 ; 2374.83,5703.46 -5.2,5703.46 ; 3126.59,5703.46 5506.61,5703.46 ; 5446.61,5683.46 5506.61,5703.46 ; 5446.61,5723.46 5506.61,5703.46 ; 5506.61,5585.35 5506.61,5821.57 ; 0,0 0,5500 5500,5500 5500,0 0,0
  text "5511.811 (mil)" at 2384.83,5667.47 h60
  text "5511.811 (mil)" at -166.06,2384.83 h60 r90

## Text inside footprints (layer, text, board x,y; h text height)
J100: Top Overlay "6" at 256.54,1549.33 h59.06 r90; Top Overlay "9" at 256.54,2013.9 h59.06 r90; Top Overlay "5" at 483.9,1999.72 h59.06 r90; Top Overlay "1" at 483.9,1573.35 h59.06 r90
J101: Top Overlay "6" at 816.54,1549.33 h59.06 r90; Top Overlay "9" at 816.54,2013.9 h59.06 r90; Top Overlay "5" at 1043.9,1999.72 h59.06 r90; Top Overlay "1" at 1043.9,1573.35 h59.06 r90
JP100: Top Overlay "2" at 3200,2700 h50 r270; Top Overlay "1" at 3100,2680 h50 r270; Top Overlay "9" at 3100,2140 h50 r270; Top Overlay "10" at 3200,2140 h50 r270
JP101: Top Overlay "2" at 1520,2720 h50 r90; Top Overlay "1" at 1620,2740 h50 r90; Top Overlay "9" at 1620,3280 h50 r90; Top Overlay "10" at 1520,3280 h50 r90